# EAGLE board signal-board (EAGLE 9.6.2)
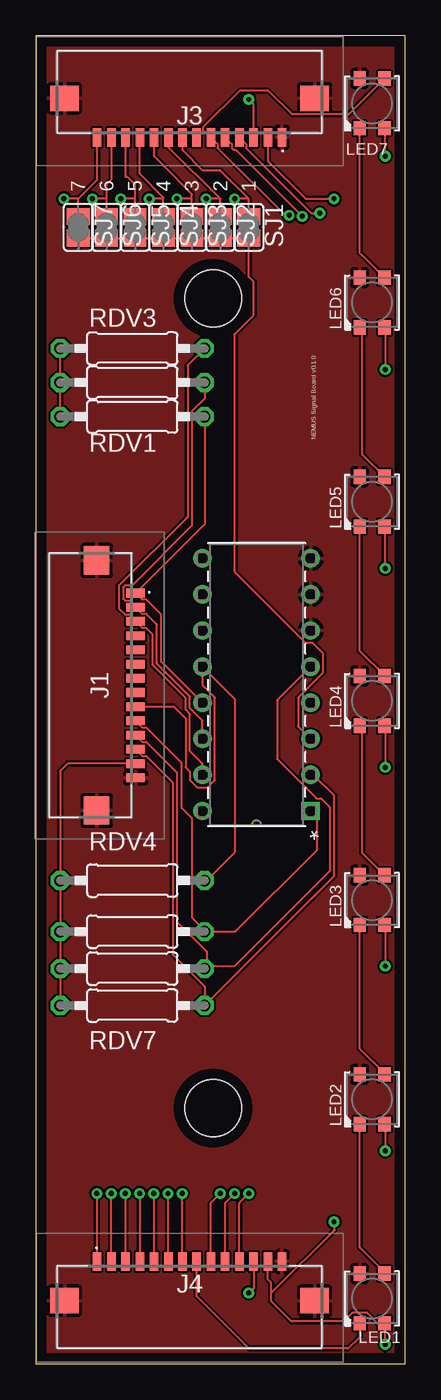
[diagram p0: board, top side]
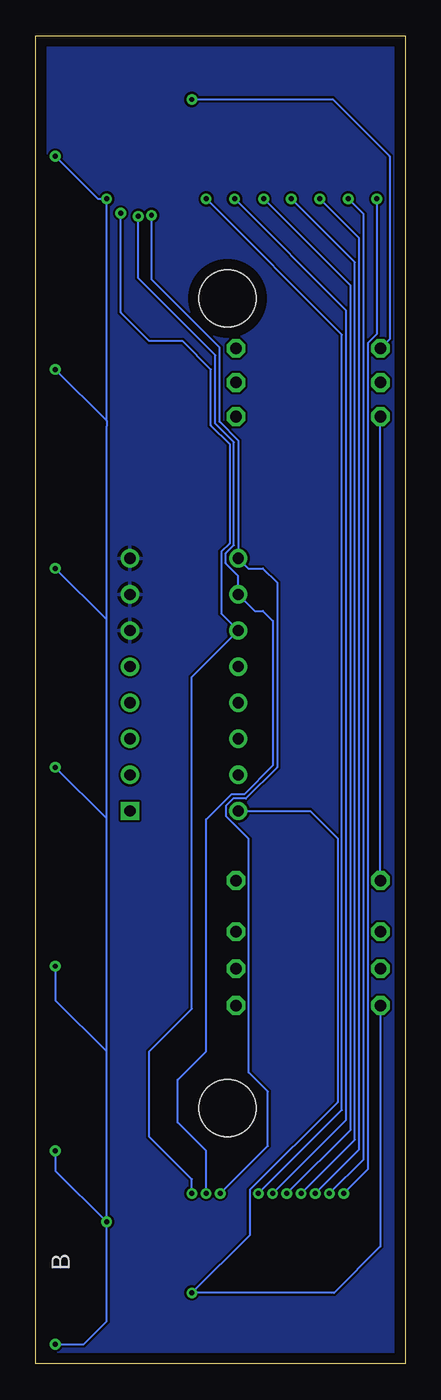
[diagram p1: board, bottom side, seen from below]

Size 26 x 93.5 mm. Coordinates in mm from the lower left corner, seen from the top.
Outline: 0,0 26,0 26,93.5 0,93.5 0,0
Copper layers (1*16): Top 0.035mm / dielectric 1.5mm / Bottom 0.035mm
Design rules "default *": minimum track width 6mil, minimum drill 0.35mm, track to track 6mil, track to pad 6mil, pad to pad 6mil, via to via 6mil, smd to smd 6mil, copper to edge 30mil, drill to drill 6mil, minimum pad ring 10mil, minimum via ring 8mil, stop-mask expansion 4mil, vias tented up to drill 0mil, thermal gap 10mil
Holes 4 mm at 12.5,75 12.5,18

## Footprints (pad centres in the part's own frame; a part is rotated, then mirrored left to right if it is on the bottom)
686114148922 = smd 0.6 x 1.3: 1 -6.5,3.05; 2 -5.5,3.05; 3 -4.5,3.05; 4 -3.5,3.05; 5 -2.5,3.05; 6 -1.5,3.05; 7 -0.5,3.05; 8 0.5,3.05; 9 1.5,3.05; 10 2.5,3.05; 11 3.5,3.05; 12 4.5,3.05; 13 5.5,3.05; 14 6.5,3.05 | smd 2 x 1.8: MP1 -8.8,0.3; MP2 8.8,0.3
LED3535 = smd 1 x 0.85: 1 -1.75,0.875; 2 -1.75,-0.875; 3 1.75,-0.875; 4 1.75,0.875
0207/10 = drill 0.813 octagon: 1 -5.08,0; 2 5.08,0
SJ = smd 1.168 x 1.6: 1 -0.762,0; 2 0.762,0
N16 = drill 0.787 pad 1.295 square: 1 0,0 | drill 0.787 pad 1.295: 2 0,-2.54; 3 0,-5.08; 4 0,-7.62; 5 0,-10.16; 6 0,-12.7; 7 0,-15.24; 8 0,-17.78; 9 7.62,-17.78; 10 7.62,-15.24; 11 7.62,-12.7; 12 7.62,-10.16; 13 7.62,-7.62; 14 7.62,-5.08; 15 7.62,-2.54; 16 7.62,0

## Placement (x,y rotation side)
J1  sensors  [686114148922]  4,47.76 270 top
J3  to_next_board  [686114148922]  10.84,89.38 180 top
J4  to_controller  [686114148922]  10.84,4.16 0 top
LED1  WS2812B3535  [LED3535]  23.68,4.61 90 top
LED2  WS2812B3535  [LED3535]  23.68,18.63 90 top
LED3  WS2812B3535  [LED3535]  23.68,32.65 90 top
LED4  WS2812B3535  [LED3535]  23.68,46.67 90 top
LED5  WS2812B3535  [LED3535]  23.68,60.69 90 top
LED6  WS2812B3535  [LED3535]  23.68,74.71 90 top
LED7  WS2812B3535  [LED3535]  23.68,88.73 90 top
RDV1  100k  [0207/10]  6.81,66.68 0 top
RDV2  100k  [0207/10]  6.81,69.08 0 top
RDV3  100k  [0207/10]  6.81,71.48 0 top
RDV4  100k  [0207/10]  6.81,34.03 0 top
RDV5  100k  [0207/10]  6.81,30.43 0 top
RDV6  100k  [0207/10]  6.81,27.83 0 top
RDV7  100k  [0207/10]  6.81,25.23 0 top
SJ1  [SJ]  15,80 270 top
SJ2  [SJ]  13,80 270 top
SJ3  [SJ]  11,80 270 top
SJ4  [SJ]  9,80 270 top
SJ5  [SJ]  7,80 270 top
SJ6  [SJ]  5,80 270 top
SJ7  [SJ]  3,80 270 top
U1  CD4051BE  [N16]  19.36,38.92 180 top

## Library data of the parts
J1 J3 J4 = 686114148922; DESCRIPTION: Wurth Elektronik WR-FPC 1mm Pitch 14 Way Horizontal SMT Female FPC Connector, ZIF Bottom Contact; HEIGHT: 2.3mm; MANUFACTURER_NAME: Wurth Elektronik; MANUFACTURER_PART_NUMBER: 686114148922; MOUSER_PART_NUMBER: 710-686114148922; MOUSER_PRICE-STOCK: https://www.mouser.co.uk/ProductDetail/Wurth-Elektronik/686114148922?qs=a9WhcLg8qCz0mPj5zZqo5g%3D%3D
LED1-LED7 = adafruit
RDV1-RDV7 = rcl; SPICEPREFIX: R
SJ1-SJ7 = jumper
U1 = CD4051BE; COPYRIGHT: Copyright (C) 2024 Ultra Librarian. All rights reserved.; MANUFACTURER_PART_NUMBER: CD4051BE; MFR_NAME: Texas Instruments

## Nets
3V: J3.2 J4.13 LED1.2 LED2.2 LED3.2 LED4.2 LED5.2 LED6.2 LED7.2
A: J3.4 J4.11 U1.11
B: J3.5 J4.10 U1.10
C: J3.6 J4.9 U1.9
C0: J1.1 RDV1.2 U1.13
C1: J1.2 RDV2.2 U1.14
C2: J1.3 RDV3.2 U1.15
C3: J1.9 RDV4.2 U1.12
C4: J1.10 RDV5.2 U1.1
C5: J1.11 RDV6.2 U1.5
C6: J1.12 RDV7.2 U1.2
DIN: J4.8 LED1.1
DOUT: J3.7 LED7.3
GND: J1.14 J1.MP1 J1.MP2 J3.1 J3.MP1 J3.MP2 J4.14 J4.MP1 J4.MP2 LED1.4 LED2.4 LED3.4 LED4.4 LED5.4 LED6.4 LED7.4 U1.6 U1.7 U1.8
N$1: LED1.3 LED2.1
N$2: LED2.3 LED3.1
N$3: LED3.3 LED4.1
N$4: LED4.3 LED5.1
N$5: LED5.3 LED6.1
N$6: LED6.3 LED7.1
S1: J3.8 J4.7 SJ1.1
S2: J3.9 J4.6 SJ2.1
S3: J3.10 J4.5 SJ3.1
S4: J3.11 J4.4 SJ4.1
S5: J3.12 J4.3 SJ5.1
S6: J3.13 J4.2 SJ6.1
S7: J3.14 J4.1 SJ7.1
SIG: SJ1.2 SJ2.2 SJ3.2 SJ4.2 SJ5.2 SJ6.2 SJ7.2 U1.3
VCC: J1.13 J3.3 J4.12 RDV1.1 RDV2.1 RDV3.1 RDV4.1 RDV5.1 RDV6.1 RDV7.1 U1.16

## Tracks (layer width: path | path; a pad name or v marks a point on that pad's centre or on a via)
3V  (via drill 0.35)
  Top 0.152: 16.58,5 16.58,4.42 18,3 21.7,3 22.29,3.59 23.32,3.59 24.05,2.86 LED1.2 24.55,1.45 v24.61,1.39 | v21,10 21,9.42 16.58,5 | LED2.2 24.61,16.83 v24.61,15 | LED3.2 24.61,30.85 v24.61,28 | LED4.2 24.61,44.87 v24.61,42 | LED5.2 24.55,56.05 v24.61,56 | LED6.2 24.61,72.91 v24.61,70 | LED7.2 24.55,85.05 v24.61,85 | J3.2 16.34,84.66 19,82 v21,82 | 16.58,5 16.58,5.72 16.34,5.96 J4.13
  Bottom 0.152: v24.61,1.39 22.61,1.39 21,3 v21,10 | v24.61,85 21.61,82 v21,82 21,66.39 | v21,10 21,22 | 21,22 21,38.39 | 21,38.39 21,52.39 | 21,52.39 21,66 21,66.39 | v24.61,15 24.61,13.61 v21,10 | v24.61,28 24.61,25.61 21,22 | v24.61,42 21,38.39 | v24.61,56 21,52.39 | v24.61,70 21,66.39
A  (via drill 0.35)
  Top 0.152: J3.4 14.81,85.86 14.81,85.58 19.4,81 v20,81 | J4.11 14.34,11.34 v15,12
  Bottom 0.152: v15,12 15,13 18,16 18,22 15,25 15,48.36 U1.11 12.92,52.8 12.92,57.19 12.35,57.76 12.35,64.75 13.66,66.06 13.66,70 15.66,72 18,72 20,74 v20,81
B  (via drill 0.35)
  Top 0.152: J3.5 13.81,85.86 13.81,85.58 13.95,85.45 14.09,85.45 v18.77,80.77 | J4.10 13.34,11.34 v14,12
  Bottom 0.152: v14,12 14,15 16,17 16,20 14,22 14,38.33 12.23,40.1 11.33,40.1 9.3,42.13 9.3,52.3 10,53 10.58,53 U1.10 11.74,55.46 12.62,56.34 12.62,57.06 12.04,57.63 12.04,64.88 13.35,66.19 13.35,71 18.77,76.42 v18.77,80.77
C  (via drill 0.35)
  Top 0.152: J3.6 12.81,85.86 12.81,85.58 17.56,80.84 v17.84,80.84 | J4.9 12.34,11.34 v13,12
  Bottom 0.152: v13,12 9.66,15.34 9.66,19.18 11,20.52 11,36.94 12.62,38.56 12.62,39.28 12.1,39.8 11.2,39.8 9,42 9,55 10,56 11.04,56 U1.9 11.74,65 13.05,66.31 13.05,71.53 17.84,76.33 v17.84,80.84
C0
  Top 0.152: RDV1.2 11.89,59.1 J1.1 7.52,53.79 7.79,53.79 8.84,52.74 8.84,49.44 U1.13
C1
  Top 0.152: RDV2.2 11.89,67.94 11,67.05 11,59 6.79,54.79 6.3,54.79 6.17,54.66 6.17,53.87 6.3,53.73 6.58,53.73 J1.2 7.52,52.79 7.79,52.79 8.54,52.05 8.54,49.31 10.86,46.98 10.86,46.18 11.74,45.3 U1.14
C2
  Top 0.152: RDV3.2 10.7,70.29 10.7,59.61 5.87,54.78 5.87,53.17 6.3,52.73 6.58,52.73 J1.3 7.52,51.79 7.79,51.79 8.23,51.35 8.23,49.18 10.56,46.86 10.56,46.05 10.86,45.75 10.86,43.14 11.74,42.26 U1.15
C3
  Top 0.152: J1.9 9.74,46.26 10.56,45.44 10.56,42 10.86,41.7 10.86,41.1 11.38,40.58 12.1,40.58 12.62,41.1 12.62,46.9 11.74,47.78 U1.12 14,46.82 14,36 12.03,34.03 RDV4.2
C4
  Top 0.152: RDV5.2 12,30.43 | 12,30.43 14.06,30.43 19.81,36.19 19.81,38.47 U1.1 | J1.10 7.52,44.79 7.79,44.79 10.25,42.33 10.25,39.17 11,38.42 11,31.43 12,30.43
C5
  Top 0.152: RDV6.2 12.03,27.97 | 12.03,27.97 12.06,28 14,28 20.7,34.7 20.7,39.2 20.1,39.8 19.78,39.8 17,42.58 17,46.72 U1.5 | J1.11 7.52,43.79 7.79,43.79 9.95,41.63 9.95,31.11 12.03,29.03 12.03,27.97
C6
  Top 0.152: U1.2 19.54,41.46 21,40 21,34.34 RDV7.2 11.89,26.57 9.64,28.82 9.64,40.94 7.79,42.79 7.52,42.79 J1.12
DIN
  Top 0.152: LED1.1 22.8,1.9 22,1.09 15,1.09 11.34,4.75 J4.8
DOUT
  Top 0.152: J3.7 11.81,86.8 11.81,87.08 14.37,89.63 16.37,89.63 18.05,87.95 22.03,87.95 LED7.3
GND
  pour Top: 0,93.5 26,93.5 26,0 0,0
  pour Bottom: 26,93.5 0,93.5 0,0 26,0
N$1
  Top 0.152: LED1.3 24.55,6.45 22.8,8.2 LED2.1
N$2
  Top 0.152: LED2.3 24.55,20.45 22.8,22.2 LED3.1
N$3
  Top 0.152: LED3.3 23,35.95 23,44.73 LED4.1
N$4
  Top 0.152: LED4.3 24.55,48.45 22.8,50.2 LED5.1
N$5
  Top 0.152: LED5.3 23,63.99 23,72.77 LED6.1
N$6
  Top 0.152: LED6.3 23.02,78 23,78 22.8,78.19 LED7.1
S1  (via drill 0.35)
  Top 0.152: J3.8 10.35,85.41 11.76,84 13,84 15,82 | SJ1.1 15,82 | 15,82 v14,82 | J4.7 10.34,11.34 v10.32,12
  Bottom 0.152: v14,82 4.45,72.45 4.45,17.87 v10.32,12
S2  (via drill 0.35)
  Top 0.152: J3.9 9.35,85.65 13,82 | SJ2.1 13,82 | 13,82 v12,82 | J4.6 9.34,11.34 v9.32,12
  Bottom 0.152: v12,82 4.14,74.14 4.14,17.18 v9.32,12
S3  (via drill 0.35)
  Top 0.152: J3.10 8.34,85 9.04,84.3 9.04,84.29 11,82.33 11,82 | 11,82 v9.95,82 | J4.5 8.34,11.33 v8.32,12 | SJ3.1 11,82
  Bottom 0.152: v8.32,12 3.84,16.48 3.84,75.89 v9.95,82
S4  (via drill 0.35)
  Top 0.152: SJ4.1 9,82.1 | J3.11 7.34,83.76 9,82.1 | 9,82.1 8.9,82 v8,82 | v7.32,12 7.32,7.23 J4.4
  Bottom 0.152: v7.32,12 3.53,15.79 3.53,77.53 v8,82
S5  (via drill 0.35)
  Top 0.152: SJ5.1 7,82 | 7,82 7,83 6.45,83.55 6.35,83.55 6.34,83.56 J3.12 | 7,82 v6,82 | v6.32,12 6.32,7.23 J4.3
  Bottom 0.152: v6,82 3.23,79.23 3.23,15.09 v6.32,12
S6  (via drill 0.35)
  Top 0.152: J3.13 5.35,83.4 5,83.05 5,82 | SJ6.1 5,82 | 5,82 v4,82 | J4.2 5.32,7.23 v5.32,12
  Bottom 0.152: v5.32,12 2.92,14.4 2.92,80.92 v4,82
S7  (via drill 0.35)
  Top 0.152: SJ7.1 3,82 | J3.14 4.34,83.34 3,82 | 3,82 v2,82 | v4.32,12 4.32,7.23 J4.1
  Bottom 0.152: v2,82 2,72.47 2.62,71.85 2.62,13.7 v4.32,12
SIG
  Top 0.152: SJ7.2 SJ6.2 SJ5.2 SJ4.2 SJ3.2 SJ2.2 SJ1.2 15,76.51 15.34,76.18 15.34,73.82 14,72.49 14,69 14,55.74 19,50.74 19.49,50.74 20.24,50 20.24,48.66 18.48,46.9 18.48,44.88 U1.3
VCC  (via drill 0.35)
  Top 0.152: RDV1.1 RDV2.1 RDV3.1 | RDV7.1 RDV6.1 RDV5.1 RDV4.1 1.73,41.73 2.26,42.26 J1.13 | J4.12 15.34,5.34 v15,5 | J3.3 15.34,88.66 v15,89
  Bottom 0.152: RDV4.1 RDV1.1 | RDV7.1 1.73,8.27 5,5 v15,5 10.93,9.07 10.93,12.25 4.75,18.43 4.75,37 6.67,38.92 U1.16 | RDV3.1 1.09,72.12 1.09,85 5.09,89 v15,89

## Text on the board
tNames: 7 | 6 | 5 | 4 | 3 | 2 | 1 | NEMUS Signal Board v0.1.0
bNames: B